# Altium PCB LED0805-2_Pcb.PcbDoc
Units mil, origin at the board's own origin, x right, y up, seen from the top; angles counter-clockwise.
Board outline 400 x 200 mil, 2 copper layers (Top Layer, Bottom Layer); 8 components, 5 nets, 12 pads, 0 vias.
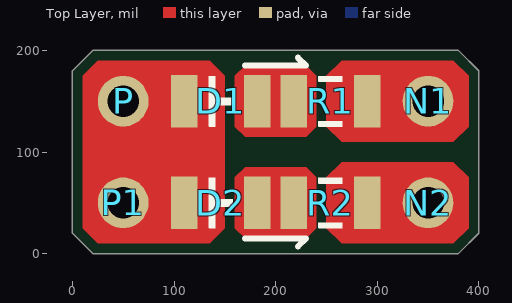
[diagram p0: Top Layer view]
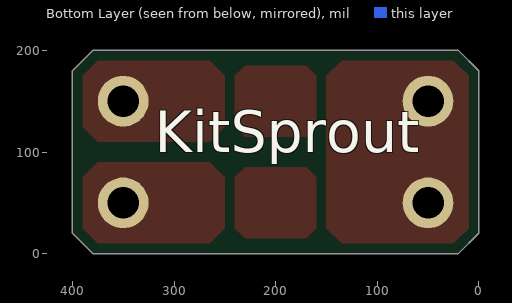
[diagram p1: Bottom Layer view, seen from below]

## Layer stack, top to bottom
Top Solder: solder mask 0.4, Solder Resist, Dk 3.5
Top Layer: signal copper 1.4
Dielectric1: dielectric 12.6, FR-4, Dk 4.8
Bottom Layer: signal copper 1.4
Bottom Solder: solder mask 0.4, Solder Resist, Dk 3.5

## Board outline
0,20 20,0 380,0 400,20 400,180 380,200 20,200 0,180

## Design rules (kind name [scope] priority, off if disabled: settings)
Clearance ClearancePolygon [InPolygon] p1: gap=6
Clearance [All] p2: gap=6
ComponentClearance [All] p1: gap=0 collisioncheckmode=3 verticalgap=0 showdistances=FALSE
Height [All] p1: minheight=0 maxheight=5000 prefheight=500
HoleToHoleClearance [All] p1: gap=6 allowstackedmicrovias=TRUE
MinimumSolderMaskSliver [All] p1: minsoldermaskwidth=6
PlaneConnect [All] p1: planeconnectstyle=Direct reliefexpansion=20 reliefentries=4 reliefconductorwidth=20 reliefairgap=10
PolygonConnect [All] p1: connectstyle=Direct reliefconductorwidth=20 reliefentries=4 polygonreliefangle="90 Angle" airgapwidth=10
RoutingVias [All] p1: holewidth=12 width=20 viastyle="Through Hole" minholewidth=12 minwidth=20 maxholewidth=100 maxwidth=200
SilkToSilkClearance [All] p1: silktosilkclearance=0
SilkToSolderMaskClearance SilkscreenOverComponentPads [IsPad] p1: minsilkscreentomaskgap=1 clearancetoexposedcopper=TRUE
SolderMaskExpansion [All] p1: expansion=0
Width [All] p1: maxlimit=30 minlimit=6 preferedwidth=10
22 further rules are at their usual default settings.

## Classes and differential pairs
component class LED0805-2_Sch: D1 D2 N1 N2 P R1 R2

## Components (designator, comment, footprint, x,y, rotation, side; value= is the part's Value field where it differs from the comment)
D1 "LED_0805" LED_0805_BLUE 146,150 r0 top
D2 "LED_0805" LED_0805_BLUE 146,50 r0 top
N1 "HDR-PAD_2.54" HDR-PAD_2.54 350,150 r0 top
N2 "HDR-PAD_2.54" HDR-PAD_2.54 350,50 r0 top
P "HDR-PAD_2.54" HDR-PAD_2.54 50,150 r90 top
P1 "HDR-PAD_2.54" HDR-PAD_2.54 50,50 r90 top (schematic designator P)
R1 "Res_0805" RES_0805 254,150 r0 top
R2 "Res_0805" RES_0805 254,50 r0 top

## Footprints (in the part's own frame and the unit in brackets; to place one, negate y for a bottom-side part, rotate by r counter-clockwise, add the part's x,y. Pads: shape width x height; smd on the part's side, far side on the other; paste and mask are expansions set on the pad)
HDR-PAD_2.54 [mil]
  round 50 hole 31: 1(0,0)
LED_0805_BLUE [mil]
  rect 26x52 smd: 1(-36,0) 2(36,0)
  silkscreen extent -12,-24 12,24, body extent -40,-25 40,25, height 43
RES_0805 [mil]
  rect 26x52 smd: 1(-36,0) 2(36,0)
  silkscreen extent -12,-24 12,24, body extent -39,-24 39,24, height 24

## Part data
D1 D2: "LED"
N1 N2 P P1: "Header"
R1 R2: "Resistor"

## Nets (pads, with @x,y where several pads share a name; then routed paths per layer and width w, separated by ;. In a path a pad name is that pad's centre, name@x,y a point inside that pad or via, vN(x,y) a via of type N, cw(c..) or ccw(c..) an arc to the next point about the centre after c; other vN are vias at no path point)
LED_N1: N1.1 R1.2
LED_N2: N2.1 R2.2
LED_P: D1.1 D2.1 P1.1 P.1
NetD1_2: D1.2 R1.1
NetD2_2: D2.2 R2.1

## Other copper
Top Layer:
  region net LED_P: 25,190 135,190 150,175 150,25 135,10 25,10 10,25 10,175
  region net LED_N2: 265,90 250,75 250,25 265,10 375,10 390,25 390,75 375,90
  region net NetD2_2: 170,85 160,75 160,25 170,15 230,15 240,25 240,75 230,85
  region net LED_N1: 265,190 250,175 250,125 265,110 375,110 390,125 390,175 375,190
  region net NetD1_2: 170,185 160,175 160,125 170,115 230,115 240,125 240,175 230,185

## Silkscreen, mask and mechanical layers (free items; w line width, h text height)
Top Overlay:
  lines w6: 170,15 230,15 222,7 ; 170,185 230,185 222,193
Bottom Overlay:
  text "KitSprout" at 319,86 h70
Top Solder:
  region: 325,10 375,10 390,25 390,75 375,90 325,90
  region: 325,110 375,110 390,125 390,175 375,190 325,190
  region: 75,190 25,190 10,175 10,125 25,110 75,110
  region: 75,90 25,90 10,75 10,25 25,10 75,10
Mechanical 1:
  the board outline again, w2

## Dimensions
380,200 to 380,0 on Mechanical 13
0,180 to 400,180 on Mechanical 13